# Altium PCB logi-mark1-edu.PcbDoc
Units mil, origin at the board's own origin, x right, y up, seen from the top; angles counter-clockwise.
Board outline 3593 x 2000 mil, 2 copper layers (Top Layer, Bottom Layer); 64 components, 58 nets, 327 pads, 71 vias.
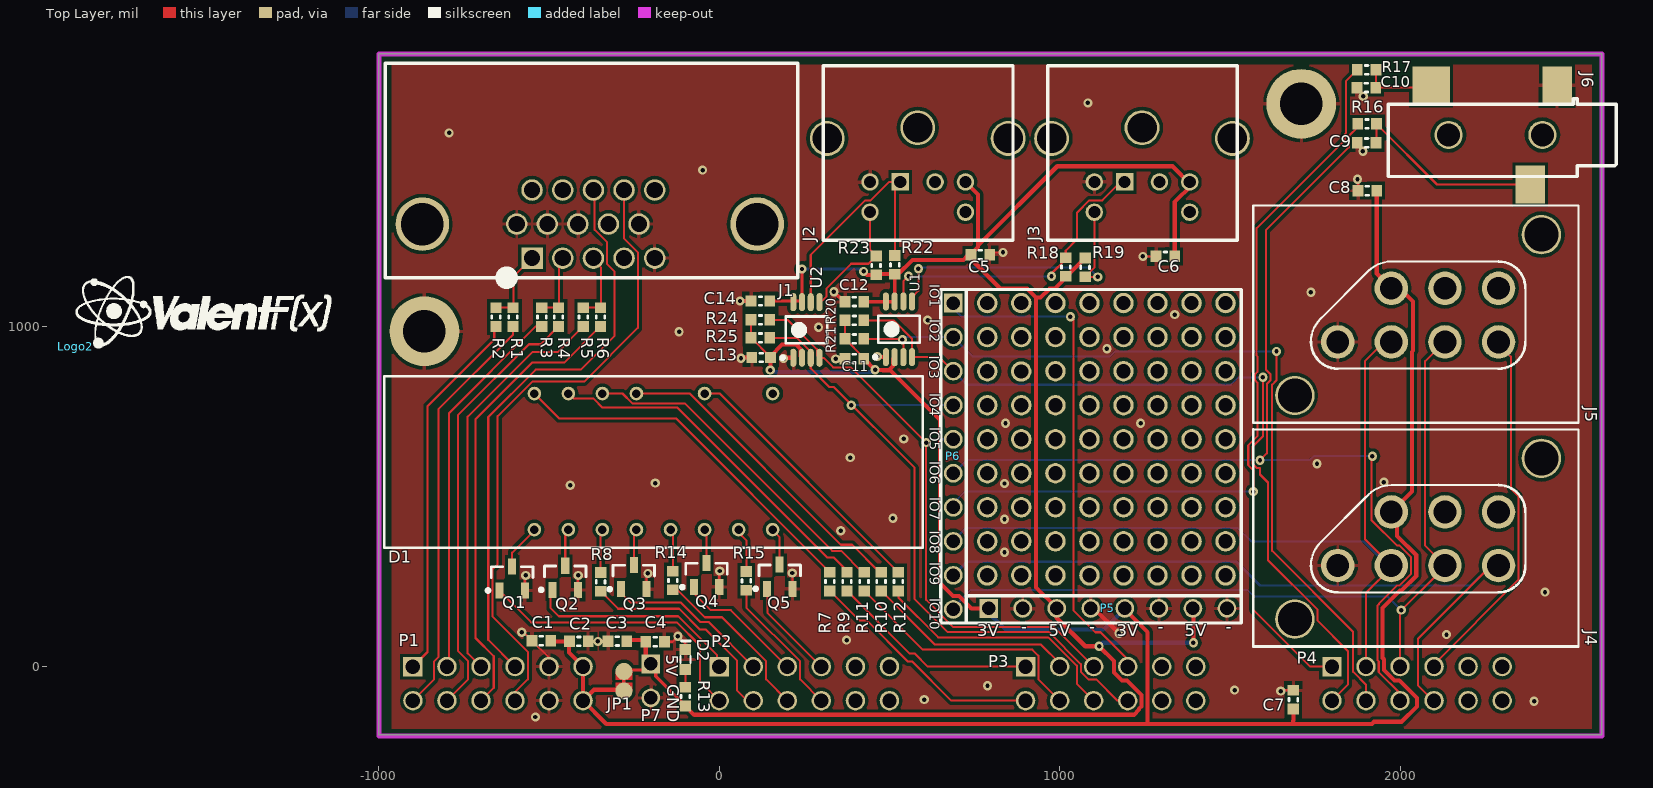
[diagram p0: Top Layer view]
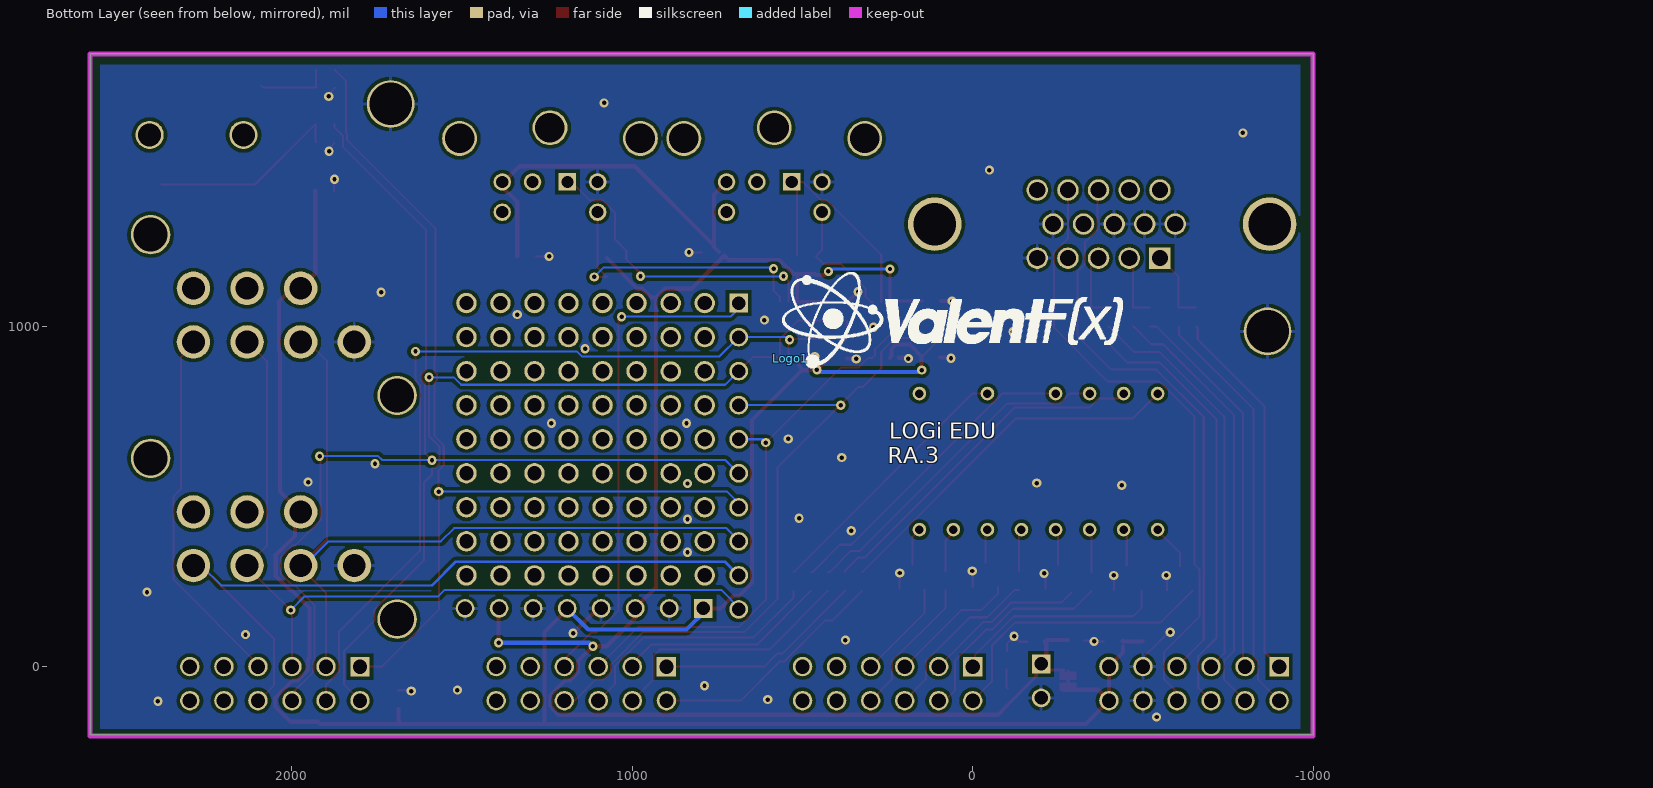
[diagram p1: Bottom Layer view, seen from below]
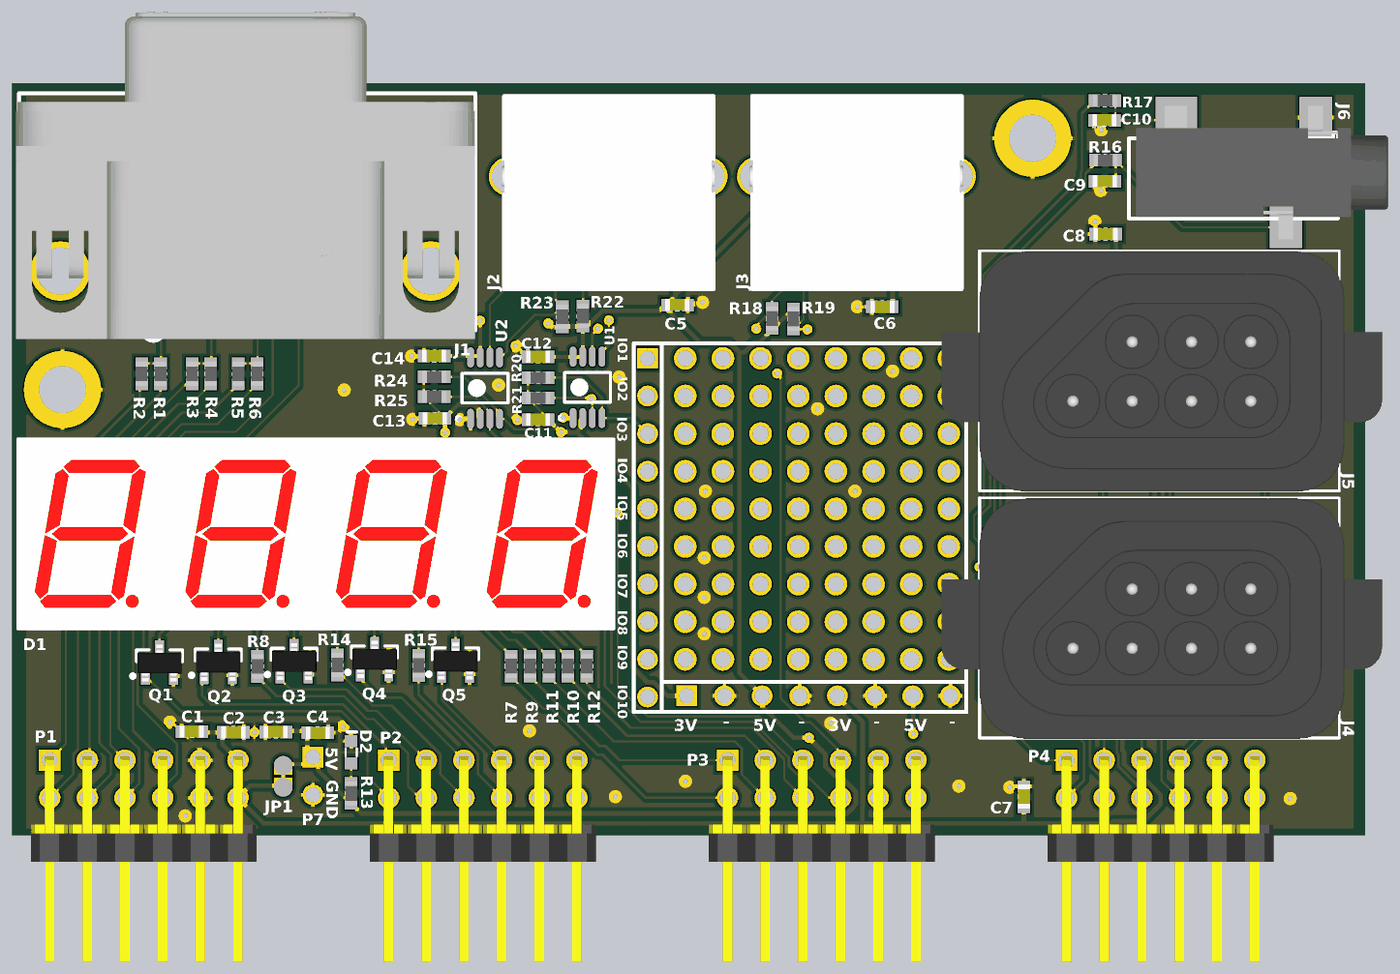
[diagram p2: 3D render of the assembled board from above, using the file's embedded part models]

## Layer stack, top to bottom
Top Solder: solder mask 0.4, Solder Resist, Dk 3.5
Top Layer: signal copper 1.4
Dielectric1: dielectric 12.6, FR-4, Dk 4.8
Bottom Layer: signal copper 1.4
Bottom Solder: solder mask 0.4, Solder Resist, Dk 3.5

## Board outline
-1000,-200 -1000,1800 2593,1800 2593,-200

## Design rules (kind name [scope] priority, off if disabled: settings)
Clearance Poly [InPoly] p1: gap=10
Clearance [All] p2: gap=6
ComponentClearance LEDS+Mounts [(HasFootprint('LTM-450')) vs (HasFootprint('LED T1-3/4 GREEN - 0.45" STANDOFF') OR HasFootprint('LED T1-3/4 RED -  0.45" STANDOFF'))] p1: gap=0 collisioncheckmode=3 verticalgap=0 showdistances=FALSE
ComponentClearance ComponentClearance_1 [OnLayer('Mechanical 1')] p2: gap=0 collisioncheckmode=3 verticalgap=0 showdistances=FALSE
ComponentClearance [All] p3: gap=10 collisioncheckmode=3 verticalgap=10 showdistances=FALSE
Height [All] p1: minheight=0 maxheight=1500 prefheight=500
HoleSize [All] p1: absolutevalues=TRUE maxlimit=250 minlimit=1 maxpercent=80.000 minpercent=20.000
HoleToHoleClearance [All] p1: gap=2 allowstackedmicrovias=TRUE
MinimumSolderMaskSliver [All] p1: minsoldermaskwidth=0
PlaneClearance [All] p1: clearance=10
PolygonConnect via [isvia] p1: connectstyle=Direct reliefconductorwidth=10 reliefentries=4 polygonreliefangle="90 Angle" airgapwidth=10
PolygonConnect PolygonConnect_1 [All] p2: connectstyle=Relief reliefconductorwidth=10 reliefentries=4 polygonreliefangle="90 Angle" airgapwidth=10
RoutingVias [All] p1: holewidth=13 width=27 viastyle="Through Hole" minholewidth=13 minwidth=27 maxholewidth=13 maxwidth=27
SilkToSilkClearance [All] p1: silktosilkclearance=0
SilkToSolderMaskClearance SilkscreenOverComponentPads [IsPad] p1: minsilkscreentomaskgap=0 clearancetoexposedcopper=TRUE
SolderMaskExpansion SolderMaskExpansion_1 [ISVIA] p1: expansion=-100
SolderMaskExpansion [All] p2: expansion=4
Width [All] p1: maxlimit=100 minlimit=6 preferedwidth=6
21 further rules are at their usual default settings.

## Classes and differential pairs
component class ANALOG_IO: C53

## Components (designator, comment, footprint, x,y, rotation, side; value= is the part's Value field where it differs from the comment)
C1 "4.7uF" C0603 -522.44,76 r180 top
C2 ".1uF" C0603 -412.44,74 r0 top
C3 ".1uF" C0603 -299.44,75 r180 top
C4 "4.7uF" C0603 -188.44,73 r0 top
C5 ".1uF" C0603 767,1210 r180 top
C6 ".1uF" C0603 1310.56,1205 r0 top
C7 ".1uF" C0603 1686.56,-97 r90 top
C8 ".1uF" C0603 1904,1398 r180 top
C9 ".1uF" C0603 1902,1538.44 r180 top
C10 ".1uF" C0603 1901,1701 r180 top
C11 ".1uF" C0603 397,905 r180 top
C12 ".1uF" C0603 397,1072 r180 top
C13 ".1uF" C0603 123,908 r180 top
C14 ".1uF" C0603 121,1074 r180 top
D1 "7SEG" "LED - SSEG - LTC-4727JR" -543.2,402.33 r0 top locked
D2 "LED 1.6X0.8MM 570NM GRN CLR SMD" "LED_0603 - GREEN" -99.44,21 r90 top
J1 "VGA" 1-1734530-1 -550,1200 r180 top locked
J2 "PS/2" "MD-60S - PS/2" 583,1335 r180 top
J3 "PS/2" "MD-60S - PS/2" 1242,1335 r180 top
J4 "450-32360" "NES - 450-32360" 1817,297 r90 top locked
J5 "450-32360" "NES - 450-32360" 1817,954 r90 top locked
J6 "SJ-3523-SMT" SJ-3523-SMT 2556,1562 r0 top locked
JP1 "Solder Jumper-NC" SOLDER_JUMPER-NC -280,-14 r90 top net-tie
Logo1 "Valent Logo 1000" ValentFX_1000 534,905 r180 bottom
Logo2 "Valent Logo 750" ValentFX_750 -1890,940 r0 top
P1 "MTSW-106-07-G-D-130-RA" "PMOD HEADER - Male"#1 -900,0 r180 top
P2 "MTSW-106-07-G-D-130-RA" "PMOD HEADER - Male"#2 250,-50 r180 top
P3 "MTSW-106-07-G-D-130-RA" "PMOD HEADER - Male"#2 1150,-50 r180 top
P4 "MTSW-106-07-G-D-130-RA" "PMOD HEADER - Male"#2 2050,-50 r180 top
P5 "Header8" "HEADER_8_40_100THRU SIP" 791.56,171 r0 top
P6 "Header10" "HEADER_10_40_100THRU SIP" 687.56,1068 r270 top
P7 "Header2" "HEADER_2_40_100 THRU SIP" -201,8 r270 top
Q1 "ZXMN2F34FHTA" SOT-23 -608.44,259 r90 top
Q2 "ZXMN2F34FHTA" SOT-23 -452.44,261 r90 top
Q3 "ZXMN2F34FHTA" SOT-23 -251,263 r90 top
Q4 "ZXMN2F34FHTA" SOT-23 -37.44,269 r90 top
Q5 "ZXMN2F34FHTA" SOT-23 177.56,264 r90 top
R1 "220" R0603 -605.86,1027 r90 top
R2 "100" R0603 -655.86,1027 r90 top
R3 "100" R0603 -521.29,1027 r90 top
R4 "220" R0603 -472.25,1027 r90 top
R5 "100" R0603 -399,1027 r90 top
R6 "220" R0603 -349,1027 r90 top
R7 "100" R0603 325,250 r270 top
R8 "100" R0603 -348.44,249 r270 top
R9 "100" R0603 375.25,250 r270 top
R10 "100" R0603 475.75,250 r270 top
R11 "100" R0603 425.5,250 r270 top
R12 "100" R0603 526,250 r270 top
R13 "330" R0603 -99.44,-88 r90 top
R14 "100" R0603 -136.44,253 r270 top
R15 "100" R0603 79.56,252 r270 top
R16 "1k" R0603 1903,1594.44 r0 top
R17 "1k" R0603 1902,1753 r0 top
R18 "10k" R0603 1018,1174 r270 top
R19 "10k" R0603 1075,1173 r90 top
R20 "10k" R0603 397,1017 r180 top
R21 "10k" R0603 397,963 r180 top
R22 "10k" R0603 516,1180.44 r270 top
R23 "10k" R0603 461,1178.44 r270 top
R24 "10k" R0603 121,1018.67 r180 top
R25 "10k" R0603 121,966 r180 top
U1 "NVT2002DP,118" "NVT2002DP,118 - TSOP65P490X110-8L" 528,991 r90 top
U2 "NVT2002DP,118" "NVT2002DP,118 - TSOP65P490X110-8L" 256,989 r90 top

## Footprints (in the part's own frame and the unit in brackets; to place one, negate y for a bottom-side part, rotate by r counter-clockwise, add the part's x,y. Pads: shape width x height; smd on the part's side, far side on the other; paste and mask are expansions set on the pad)
1-1734530-1 [mm] "VGA DB15 HD connector female"
  rect 1.6x1.6 hole 1.2: 1(0,0)
  round 1.6 hole 1.2: 2(-2.29,0) 3(-4.58,0) 4(-6.87,0) 5(-9.16,0) 6(1.14,-2.54) 7(-1.14,-2.54) 8(-3.42,-2.54) 9(-5.7,-2.54) 10(-7.98,-2.54) 11(0,-5.08) 12(-2.29,-5.08) 13(-4.58,-5.08) 14(-6.87,-5.08) 15(-9.16,-5.08)
  round 4 hole 3.18: X(-16.81,-2.54) X(8.18,-2.54)
  silkscreen extent -19.82,-14.54 10.96,1.54, body extent -19.79,-20.01 11.16,2.04, height 12.25
C0603 [mm] "0603 Generic"
  rect 0.8x0.85 smd: 1(-0.7,0) 2(0.7,0)
  silkscreen extent -0.1,-0.33 0.1,0.33, body extent -0.8,-0.42 0.82,0.4, height 0.46
"HEADER_2_40_100 THRU SIP" [mil]
  rect 55x55 hole 40: 1(0,0)
  round 55 hole 40: 2(100,0)
"HEADER_8_40_100THRU SIP" [mil]
  rect 55x55 hole 40: 1(0,0)
  round 55 hole 40: 2(100,0) 3(200,0) 4(300,0) 5(400,0) 6(500,0) 7(600,0) 8(700,0)
"HEADER_10_40_100THRU SIP" [mil] "HEADER 100 MIL PITCH"
  rect 55x55 hole 40: 1(0,0)
  round 55 hole 40: 2(100,0) 3(200,0) 4(300,0) 5(400,0) 6(500,0) 7(600,0) 8(700,0) 9(800,0) 10(900,0)
"LED - SSEG - LTC-4727JR" [mil] "LED - SSEG - LTC-4727JR"
  round 40 hole 25: 1(0,0) 2(100,0) 3(200,0) 4(300,0) 5(400,0) 6(500,0) 7(600,0) 8(700,0) 9(700,400) 11(500,400) 13(300,400) 14(200,400) 15(100,400) 16(0,400)
  silkscreen extent -441,-53 1141,451, body extent -441,-53 1141,451, height 276
"LED_0603 - GREEN" [mm] "LED_0603 - GREEN"
  rect 0.8x0.85 smd: A(-0.75,0) C(0.75,0)
  silkscreen extent -0.25,-0.38 1.37,0.38, body extent -0.8,-0.4 0.8,0.4, height 0.75
"MD-60S - PS/2" [mm]
  rect 1.3x1.3 hole 0.9: 1(1.3,-2.26)
  round 1.3 hole 0.9: 2(-1.3,-2.26) 3(3.56,-2.26) 4(-3.56,-2.26) 5(3.56,0) 6(-3.56,0)
  round 2.6 hole 2.2: x(-6.75,-5.5) x(0,-6.3) x(6.75,-5.5)
  silkscreen extent -7.11,-10.92 7.04,2.1, body extent -7.17,-11 7.17,2.1, height 13.3
"NES - 450-32360" [mm] "NES Controller Socket"
  round 2.5 hole 1.7: 1(0,0) 2(0,-4) 3(0,-8) 4(0,-12) 5(4,-12) 6(4,-8) 7(4,-4)
  round 2.94 hole 2.54 paste+0: 8(-4,3.2) 9(8,-15.2)
  silkscreen extent -6.04,-17.96 10.16,6.3, body extent -6.12,-20.85 10.13,8.86, height 17.61
"NVT2002DP,118 - TSOP65P490X110-8L" [mm] "TSOP, 8-Leads, Body 3.1x3.1mm (max), Pitch 0.65mm, IPC High Density"
  oval 1.35x0.45 smd: 1(-2.075,0.975) 2(-2.075,0.325) 3(-2.075,-0.325) 4(-2.075,-0.975) 5(2.075,-0.975) 6(2.075,-0.325) 7(2.075,0.325) 8(2.075,0.975)
  silkscreen extent -2.2,-1.55 1,1.9, body extent -1.55,-1.55 1.55,1.55, height 1.1
"PMOD HEADER - Male"#1 [mil] "68021-212HLF"
  rect 57x57 hole 42: 1(0,0)
  round 57 hole 42: 2(-100,0) 3(-200,0) 4(-300,0) 5(-400,0) 6(-500,0) 7(0,100) 8(-100,100) 9(-200,100) 10(-300,100) 11(-400,100) 12(-500,100)
  body extent -550,-10 50,536, height 225
"PMOD HEADER - Male"#2 [mil] "68021-212HLF"
  rect 57x57 hole 42: 1(250,-50)
  round 57 hole 42: 2(150,-50) 3(50,-50) 4(-50,-50) 5(-150,-50) 6(-250,-50) 7(250,50) 8(150,50) 9(50,50) 10(-50,50) 11(-150,50) 12(-250,50)
  body extent -300,-60 300,486, height 225
R0603 [mm] "0603 Generic"
  rect 0.8x0.85 smd: 1(-0.7,0) 2(0.7,0)
  silkscreen extent -0.1,-0.33 0.1,0.33, body extent -0.81,-0.41 0.81,0.41, height 0.46
SJ-3523-SMT [mm] "3.5MM Stereo Audio Jack"
  rect 2.2x2.8 smd: 1(-2.4,3.7) 3(-4.4,-3.7)
  rect 2.8x2.8 smd: 2(-11.8,3.7)
  round 2.108 hole 1.727 unplated: H1(-3.5,0) H2(-10.5,0)
  silkscreen extent -15,-3.1 2,2.7, body extent -14.52,-4.5 2.48,4.5, height 5.04
SOLDER_JUMPER-NC [mil]
  round 50 smd: 1(0,0) 2(-58,0)
  Top Layer region: 0.09,25.01 -24.91,25.01 -24.91,-24.99 0.09,-24.99
  Top Layer region: -32.91,25.01 -57.91,25.01 -57.91,-24.99 -32.91,-24.99
  Top Layer lines w10: -50,0 0,0
SOT-23 [mm] "SOT-23"
  rect 1.2x0.6 smd: 1(-0.9,0.95) 2(-0.9,-0.95) 3(0.9,0)
  silkscreen extent -1.02,-1.55 0.87,1.92, body extent -1.27,-1.5 1.23,1.5, height 1.07
ValentFX_750 [mil]
  silkscreen extent 0,-3 750,207
ValentFX_1000 [mil]
  silkscreen extent -25,-28 975,252

## Part data
C1 C4: library part "C0603 - GRM188F51A475ZE20D", "4.7uF 10volts Y5V +80-20% (MLCC) - SMD/SMT 0603"
C2 C3 C5 C6 C7 C8 C9 C10 C11 C12 C13 C14: library part "C0603 - GRM188R71H104KA93D", "0.1uF 50volts X7R 10% MLCC SMD/SMT 0603"
D1: library part "LED - SSEG - LTC-4727JR", "LED Displays & Accessories 4 Digit, Red Low Current"
D2: library part APT1608CGCK
J1: library part "VGA - 1-1734530-1", "CONN HD D-SUB RCPT R/A 15POS"
J2 J3: library part "Con - D-60S", "CONN MINIDIN RECPT UNSHIELD 6POS - PS/2 mouse - keybaord"
J4 J5: "NES CONTROLLER SOCKET"
J6: "CONN AUDIO JACK 3.5MM STEREO SMD"
JP1: "Solder/Configuration Jumper"
P1 P2 P3 P4: library part "P-MOD - MTSW-106-07-G-D-130-RA", "Samtec Male Conn Unshrouded Header HDR 12 POS 2.54mm Solder RA Thru-Hole"
P5: "Header 8 pin"
P6: "Header 10 pin"
P7: "Header 2 pin"
Q1 Q2 Q3 Q4 Q5: "MOSFET N-CHAN 20V SOT23-3"
R1 R4 R6: library part "R0603 - ERJ-3EKF2200V", "220 - thick Film Resistors - SMD 0603 220ohms 1% Tol"
R2 R3 R5: library part "R0603 - CRCW0603100RFKEA", "100 ohms 1% Thick Film Resistors - SMD 1/10watt"
R7 R8 R9 R10 R11 R12 R14 R15: library part Res-Eli, "RES 10.0K OHM 1/10W 1% 0603 SMD"
R13: library part ERJ-3EKF3300V, "RES 330 OHM 1/10W 1% 0603 SMD"
R16 R17: library part ERJ-3EKF1001V, "RES 1.00K OHM 1/10W 1% 0603 SMD"
R18 R19 R20 R21 R22 R23 R24 R25: library part "R0603 - CRCW060310K0FKEA", "10k Thick Film Resistors - SMD 1/10watt 10Kohms 1%"
U1 U2: "Translation - Open Drain - 2 Lines - Voltage Levels Interface IC"

## Free pads (board coordinates)
  round 205 / inner round 140 / far side round 140 hole 125: MT1(1710,1653) MT2(-866,985)
  round 60 hole 42: X(787.56,268) X(787.56,368) X(787.56,468) X(787.56,568) X(787.56,668) X(787.56,768) X(787.56,868) X(787.56,968) X(787.56,1068) X(887,867) X(887.56,268) X(887.56,368) X(887.56,468) X(887.56,568) X(887.56,668) X(887.56,768) X(887.56,968) X(887.56,1068) X(987.56,268) X(987.56,368) X(987.56,468) X(987.56,568) X(987.56,668) X(987.56,768) X(987.56,868) X(987.56,968) X(987.56,1068) X(1087.56,268) X(1087.56,368) X(1087.56,468) X(1087.56,568) X(1087.56,668) X(1087.56,768) X(1087.56,868) X(1087.56,968) X(1087.56,1068) X(1187.56,268) X(1187.56,368) X(1187.56,468) X(1187.56,568) X(1187.56,668) X(1187.56,768) X(1187.56,868) X(1187.56,968) X(1187.56,1068) X(1287.56,268) X(1287.56,368) X(1287.56,468) X(1287.56,568) X(1287.56,668) X(1287.56,768) X(1287.56,868) X(1287.56,968) X(1287.56,1068) X(1387.56,268) X(1387.56,368) X(1387.56,468) X(1387.56,568) X(1387.56,668) X(1387.56,768) X(1387.56,868) X(1387.56,968) X(1387.56,1068) X(1487.56,268) X(1487.56,368) X(1487.56,468) X(1487.56,568) X(1487.56,668) X(1487.56,768) X(1487.56,868) X(1487.56,968) X(1487.56,1068)

## Via types
v1: diameter 27, hole 13, Top Layer to Bottom Layer, 71 vias

## Nets (pads, with @x,y where several pads share a name; then routed paths per layer and width w, separated by ;. In a path a pad name is that pad's centre, name@x,y a point inside that pad or via, vN(x,y) a via of type N, cw(c..) or ccw(c..) an arc to the next point about the centre after c; other vN are vias at no path point)
3V3: C1.1 C2.1 C7.1 C8.1 C11.1 C13.1 J4.7 J5.7 JP1.2 P1.6 P1.12 P5.1 P5.5 R20.2 R21.2 R24.2 R25.2 U1.2 U2.2 | length 7198.5
  Top Layer w6: R24.2 R25.2 150.56,908.88 C13.1 ; R20.2 R21.2 424.56,907.88 C11.1
  Top Layer w12: C1.1@-498.44,75 -497.44,74 C2.1@-440.44,74 ; C2.1@-441,58.44 -441,41 P1.6 ; C2.1@-440.44,76 C2.1@-440.44,74 ; C2.1 C2.1@-440.44,74 ; P1.6@-403.44,-5 -400,-8.44 P1.12 ; JP1.2@-267,-68 -368,-68 P1.12 ; v1(150,871) 150,907.44 C13.1 ; C13.1@150.56,908.88 150.56,911.56 184.88,945.88 226.25,945.88 238.47,933.66 238.47,912.04 U2.2 ; C11.1 v1(457.71,871.85) 479.85,871.85 480.97,870.73 498.25,870.73 ; U1.2 510.47,904.57 510.47,882.95 498.25,870.73 ; P5.1 740.42,171 703.92,207.5 686.5,207.5 648.06,245.94 648.06,723.94 501.27,870.73 498.25,870.73 ; P5.5@1181.56,178 1258.5,101.06 1258.5,-124.23 1257.56,-125.17 1257.56,-166 ; 1685.56,-160 1686.56,-159 C7.1 ; C8.1 1931.56,1154.4 J5.7 ; J4.7 2034.56,514.56 2034.56,924.51 2038.69,928.65 2038.69,1072.87 J5.7@1991.56,1120 ; J4.7@1991.56,442 1991.56,383.46 2047.69,327.33 2047.69,266.67 2004.81,223.79 2000.35,223.79 1948.56,172 1948.56,25.69 1952.5,21.75 1952.5,-9.78 1983.22,-40.5 1997.78,-40.5 2049.56,-92.28 2049.56,-117 2004.56,-162 1923.56,-162 1917.56,-168 -332,-168 P1.12
  Bottom Layer w12: v1(150,871) 155,866 451.85,866 v1(457.71,871.85) ; P5.1@779.56,170 840.56,109 1129.56,109 P5.5
GND: C1.2 C2.2 C3.2 C4.2 C5.1 C6.1 C7.2 C8.2 C9.2 C10.2 C11.2 C12.2 C13.2 C14.2 D2.C J1.5 J1.6 J1.7 J1.8 J1.10 J2.3 J3.3 J4.1 J5.1 J6.1 P1.5 P1.11 P5.2 P5.4 P5.6 P5.8 P7.2 pad.MT1 pad.MT2 Q1.2 Q2.2 Q3.2 Q4.2 Q5.2 U1.1 U2.1 | length 1050.5
  Top Layer w6: v1(-580.44,101) -575,101 C1.2 ; Q1.2 -571.04,265.4 v1(-568.44,268) ; C1.2@-552.44,78 -500,25.56 P1.5 ; Q2.2 -415.04,267.4 v1(-414.44,268) ; C2.2 v1(-356.44,74) -353.44,77 C3.2@-327.44,77 ; Q3.2 -213.6,269.84 v1(-209.44,274) ; C4.2 -137.44,73 v1@-121.94,88.5 ; D2.C@-100.44,45 -100.44,67 v1@-121.94,88.5 ; Q4.2 -0.04,279.4 v1(1.56,281) ; v1(214.56,275) 214.96,274.6 Q5.2 ; C5.1@795.12,1217 v1(833.56,1217) ; v1(1244.56,1205) C6.1 ; v1(1649.56,-72) 1652.12,-69.44 C7.2 ; C10.2 1892,1682.44 v1(1892,1675) ; C9.2 1891,1521.88 v1(1891,1514) ; v1(1875,1432) 1876.44,1430.56 C8.2 ; v1@-121.94,88.5 -122.44,89 v1(-121.44,89) v1@-121.94,88.5
  Top Layer w12: v1(61,1074) C14.2 ; v1(64,906) 66,908 C13.2 ; v1(189,905) 191.31,907.31 U2.1 ; v1(337,1101) 366,1072 C12.2 ; v1(342,904) 343,905 C11.2 ; v1(464,911) 465.69,909.31 U1.1 ; P5.4 1101,171 v1(1174,98)
  other v1: -540,-148 2394,-102 602,-97 1514,-69 788,-56 374,78 2136.56,94 2426,219 838,336 357,399 838,433 510,436 -438,533 838,538 -188,539 1952.56,542 1756,595.9 385,614 542,669 841,715 1238,715 1139,934 -118,984 292,997 612,1018 1338,1034 1738.26,1099.87 -49,1458.65 -793.8,1568 1083,1656
IO1: P3.4 P6.1 | length 1484.5
  Top Layer w6: v1(1031.56,1028) 1040.56,1019 1040.56,165.44 1105,101 1120,101 1200,21 P3.4
  Bottom Layer w6: P6.1@670.56,1069 711.56,1028 v1(1031.56,1028)
NES1_DAT: J5.4 P4.4 | length 1062.9
  Top Layer w6: P4.4 2100,7.44 2347.65,255.09 2347.65,500.69 2326.66,521.68 2326.66,905.9 2325.66,904.9 2325.66,910.9 J5.4@2298.56,938
NES2_DAT/IO9: J4.4 P4.10 P6.9 | length 2147.8
  Top Layer w6: P4.10@2093.56,-96 2052.56,-55 2052.56,81 2258.56,287 J4.4@2275.56,287
  Bottom Layer w6: 1588.56,238.79 2208.35,238.79 J4.4@2264.56,295
  Bottom Layer w8: P6.9 727.56,308 1519.35,308 1588.56,238.79
NES_CLK/IO8: J4.2 J5.2 P4.2 P6.8 | length 2377.1
  Top Layer w6: P4.2 1900,216.44 J4.2@1975.56,292 ; J5.2@1950.56,948 1947.56,948 1896.5,896.94 1896.5,374.98 J4.2
  Bottom Layer w6: P6.8@681.56,365 723.56,407 1523.56,407 1562.56,368 1892.56,368 J4.2@1964.56,296
NES_LAT/IO10: J4.3 J5.3 P4.3 P6.10 | length 2390.3
  Top Layer w6: P4.3 v1@2000,161.44 ; v1@2004.06,165.5 J4.3@2114.56,276 ; J5.3@2110.56,934 2073.75,897.19 2073.75,355.21 J4.3 ; J4.3@2115.56,275 J4.3@2134.76,294.2
  Bottom Layer w6: P6.10@682.56,169 739.06,225.5 1551.45,225.5 1570.56,206.39 1963.17,206.39 v1(2003.56,166)
NetC9_1: C9.1 J6.3 R16.2 | length 580.2
  Top Layer w6: C9.1@1930,1540.44 1930.56,1541 R16.2 2108.67,1416.33 J6.3
NetC10_1: C10.1 J6.2 R17.2 | length 218.1
  Top Layer w6: R17.2 1929.56,1702 C10.1 2084.76,1701 J6.2
NetD1_1: D1.1 Q1.3 | length 133.9
  Top Layer w6: Q1.3 -608.44,335 D1.1@-542.44,401
NetD1_2: D1.2 Q2.3 | length 107.5
  Top Layer w6: Q2.3 -452.44,393 -445.44,400 D1.2@-445.44,401
NetD1_3: D1.3 R8.1 | length 130.3
  Top Layer w6: R8.1 -348.44,404 D1.3@-346.44,406
NetD1_4: D1.4 Q3.3 | length 104.7
  Top Layer w6: Q3.3 -251,392.44 D1.4@-243.44,400
NetD1_5: D1.5 R14.1 | length 127.8
  Top Layer w6: D1.5@-144.44,405 -136.44,397 R14.1
NetD1_6: D1.6 Q4.3 | length 92.1
  Top Layer w6: D1.6@-43.44,394 -37.44,388 Q4.3
NetD1_7: D1.7 R15.1 | length 124
  Top Layer w6: D1.7@56.56,394 79.56,371 R15.1
NetD1_8: D1.8 Q5.3 | length 106
  Top Layer w6: D1.8@159.56,398 177.56,380 Q5.3
NetD1_11: D1.11 R12.1 | length 786.6
  Top Layer w6: D1.11 1.23,802.33 R12.1
NetD1_13: D1.13 R10.1 | length 936.3
  Top Layer w6: D1.13 -87.04,802.33 357.29,358 390.27,358 470.71,277.56 R10.1
NetD1_14: D1.14 R11.1 | length 986.1
  Top Layer w6: D1.14 -284.21,802.33 -255.21,773.33 -101.33,773.33 332,340 358.02,340 420.46,277.56 R11.1
NetD1_15: D1.15 R9.1 | length 1038.3
  Top Layer w6: D1.15 -427.87,787 -368.88,787 -343.21,761.33 -123.33,761.33 318,320 337,320 375.25,281.75 R9.1
NetD1_16: D1.16 R7.1 | length 1085.6
  Top Layer w6: D1.16 -469.87,729 -126.44,729 R7.1
NetD2_A: D2.A R13.2 | length 56.7
  Top Layer w6: R13.2@-102.44,-64 -99.44,-61 R13.2 D2.A
NetJ1_1: J1.1 R1.2 R2.2 | length 218.6
  Top Layer w6: R2.2 R1.2 -604.86,1055.56 -604.86,1145.14 J1.1
NetJ1_2: J1.2 R3.2 R4.2 | length 199.6
  Top Layer w6: R3.2 R4.2 -471.25,1055.56 -471.25,1188.59 J1.2
NetJ1_3: J1.3 R5.2 R6.2 | length 211.3
  Top Layer w6: R5.2 R6.2 -348,1055.56 -348,1173 J1.3@-378,1203
PS2_1_CLK/IO3: P4.7 P6.3 R20.1 U1.4 | length 2395.7
  Top Layer w6: R20.1 512.82,1017 566.39,963.43 U1.4 646.25,909.31 P6.3 ; v1(1597,850) 1597,676 1566.06,645.06 1566.06,596.68 1579.24,583.5 1588.56,583.5 1588.56,564.44 1612.14,540.86 1612.14,312.97 1757.89,167.22 1757.89,135.11 1847,46 1847,-53 P4.7
  Bottom Layer w6: P6.3 727.56,828 1502.71,828 1524.71,850 v1(1597,850)
PS2_1_CLK/IO3_HV: J3.5 R19.1 U1.5 | length 881.3
  Top Layer w6: U1.5 566.39,1085 585,1103.61 v1(585,1169) ; J3.5 1101.84,1172.28 R19.1 1075.44,1145 v1(1112,1145)
  Bottom Layer w6: v1(585,1169) 588,1172 1085,1172 v1(1112,1145)
PS2_1_DAT/IO2: P4.8 P6.2 R21.1 U1.3 | length 2443.8
  Top Layer w6: R21.1 535,963 v1(538,960) 540.8,957.2 U1.3 ; v1(1637,926) 1637,841.21 1624.14,828.35 1624.14,340.14 1862.5,101.78 1862.5,-15.53 1900,-53.03 P4.8
  Bottom Layer w6: v1(538,960) 546,968 P6.2 744.06,911.5 1148.32,911.5 1162.82,926 v1(1637,926)
PS2_1_DAT/IO2_HV: J3.1 R18.1 U1.6 | length 895.6
  Top Layer w6: U1.6 540.8,1131.8 v1(556,1147) ; v1(976,1147) 976,1154.92 1018,1196.92 R18.1 1018,1222 1051,1255 1051,1333.08 1087.51,1369.59 1125.59,1369.59 1179.98,1423.98 J3.1
  Bottom Layer w6: v1(556,1147) 556.5,1146.5 975.5,1146.5 v1(976,1147)
PS2_2_CLK/IO5: P3.3 P6.5 R24.1 U2.4 | length 1753.2
  Top Layer w6: R24.1 200.41,1018.67 286.65,932.42 286.65,915.04 U2.4 306.87,907.31 334.91,879.27 386.73,879.27 v1(608,658) 608,195.94 687.94,116 984,116 P3.3 P3.3@1100,3.56 ; P3.3@1099.28,-0.72 P3.3@1107.56,-9
  Bottom Layer w6: v1(608,658) 618,668 P6.5
PS2_2_CLK/IO5_HV: J2.5 R23.1 U2.5 | length 372.8
  Top Layer w6: U2.5 298.13,1070.69 314.5,1087.06 314.5,1110.32 387.68,1183.5 438.5,1183.5 R23.1 442.84,1224.16 J2.5
PS2_2_DAT/IO4: P3.10 P6.4 R25.1 U2.3 | length 2060.6
  Top Layer w6: R25.1 227.48,966 268.8,924.69 U2.3 268.8,876.2 324,821 337,821 574,584 574,198 670,102 968,102 1062.5,7.5 1062.5,-15.53 1084.47,-37.5 1107.5,-37.5 1170,-100 P3.10
  Bottom Layer w6: v1(388,768) P6.4
PS2_2_DAT/IO4_HV: J2.1 R22.1 U2.6 | length 713.4
  Top Layer w6: U2.6 268.8,1209.87 428.51,1369.59 444.59,1369.59 498.98,1423.98 J2.1 516,1408.16 R22.1
PWM1/IO6: P4.9 P6.6 R16.1 | length 3215.1
  Top Layer w6: v1(1588.56,606) 1609,626.44 1609,830.18 1619.5,840.68 1619.5,859.32 1606,872.82 1606,1282 1849.69,1525.69 1849.69,1558.9 1875.44,1584.65 R16.1 ; v1(1919,618) 1916.27,615.27 1916.27,430.37 1991.42,355.21 1998.59,355.21 2032.69,321.11 2032.69,272.89 1998.59,238.79 1991.79,238.79 1938,185 1938,182.65 1933.56,178.21 1933.56,19.47 1937.5,15.53 1937.5,-15.99 2000,-78.49 P4.9
  Bottom Layer w6: P6.6 726.56,607 1735.28,607 1746.68,618.4 1918.6,618.4 v1(1919,618)
PWM2/IO7: P4.1 P6.7 R17.1 | length 2938.4
  Top Layer w6: P4.1 1735.96,0 1568.56,167.4 v1(1568.56,514) 1570.06,515.5 1570.06,575.71 1554.06,591.71 1554.06,650.03 1581,676.97 1581,834.18 1574.5,840.68 1574.5,859.32 1581,865.82 1581,911.35 1579,913.35 1579,1288 1837.69,1546.69 1837.69,1563.87 1841,1567.18 1841,1719.56 R17.1
  Bottom Layer w6: P6.7@680.56,473 721.56,514 v1(1568.56,514)
SEG_CTRL_A1: P2.7 Q1.1 | length 841.7
  Top Layer w6: Q1.1 -552.28,130 -124.44,130 -56.44,62 -56.44,-43.56 P2.7
SEG_CTRL_A2: P2.1 Q2.1 | length 668.4
  Top Layer w6: Q2.1@-495.44,224 -495.44,172 -471.44,148 -121,148 -6.44,33.44 -6.44,6.44 P2.1 ; P2.1@-26.44,20 P2.1@-2.44,-4
SEG_CTRL_A3: P2.3 Q4.1 | length 385.1
  Top Layer w6: Q4.1 -74.84,215.4 -25.44,166 34,166 P2.3 ; P2.3@200.56,7 P2.3@202.56,5
SEG_CTRL_A4: P2.4 Q5.1 | length 292.5
  Top Layer w6: Q5.1@143.56,226 141.56,224 141.56,158.44 P2.4
SEG_CTRL_L: P2.2 Q3.1 | length 479.3
  Top Layer w6: Q3.1@-289.44,217 -260.44,188 -112.44,188 -55.44,131 -31,131 P2.2
SSEG0_A: P3.8 R11.2 | length 748.9
  Top Layer w6: R11.2 597.94,50 919.73,50 937.5,32.23 937.5,-37.5 P3.8
SSEG1_B: P3.7 R7.2 | length 708.6
  Top Layer w6: R7.2 411.44,136 433,136 554,15 567,15 682,-100 P3.7
SSEG2_C: P3.2 R10.2 | length 622.2
  Top Layer w6: R10.2 633.19,65 945,65 1000,10 P3.2
SSEG3_D: P2.8 R8.2 | length 644.6
  Top Layer w6: R8.2 -297,170 -117.69,170 -56.69,109 -39.27,109 51.56,18.17 51.56,-70 95.56,-114 P2.8@95.56,-107 ; P2.8@97.56,-107 P2.8@97.56,-104
SSEG4_E: P2.9 R14.2 | length 505.9
  Top Layer w6: R14.2 -122.88,225.44 -42.44,145 8.03,145 137.5,15.53 137.5,-37.5 P2.9@199,-99 ; P2.9 P2.9@199,-99 ; P2.9@202.56,-99 P2.9@199,-99
SSEG5_F: P3.9 R12.2 | length 750
  Top Layer w6: R12.2 526,203 643,86 967.03,86 1050.5,2.53 1050.5,-50.5 P3.9
SSEG6_G: P3.1 R9.2 | length 616.9
  Top Layer w6: R9.2 559.69,38 575,38 613,0 P3.1
SSEG7_DP: P2.10 R15.2 | length 415.8
  Top Layer w6: R15.2 79.56,173.47 237.5,15.53 237.5,-37.5 P2.10
VDD_PS2: C3.1 C4.1 C5.2 C6.2 C12.1 C14.1 J2.4 J3.4 JP1.1 P5.3 P5.7 P7.1 R13.1 R18.2 R19.2 R22.2 R23.2 U1.7 U1.8 U2.7 U2.8 | length 6026.5
  Top Layer w10: JP1.1@-267,-10 -197,-10 -187,0 -187,-28 R13.1 ; C14.1 239.9,1074 U2.7 243.2,1167.8 v1(243,1168) ; C12.1 514.51,1072 U1.7 516,1073.49 R22.2
  Top Layer w12: C3.1@-278.44,77 -279.44,78 -216.44,78 C4.1@-211.44,73 ; C4.1 -216,29 P7.1@-187,0 ; R13.1 -73.5,-141.5 1218.06,-141.5 1233.56,-126 1233.56,-123.72 1240.5,-116.78 1240.5,-83.22 1197.78,-40.5 1183.22,-40.5 1159.5,-16.78 1159.5,16.06 v1(1115.78,59.78) 1075.22,59.78 991.56,143.44 P5.3 ; v1(424,1161) 434.12,1150.88 R23.2 463,1152.88 R22.2 525.82,1152.88 567.44,1194.5 717.5,1194.5 730,1207 827,1110 904.96,1110 931.06,1083.9 ; J2.4 760.75,1386.39 760.75,1237.75 ; C5.2@745.56,1218 760.75,1233.19 760.75,1237.75 ; P5.3@990.56,173 931.06,232.5 931.06,1083.9 ; R19.2 984.44,1110 970.16,1110 944.06,1083.9 931.06,1083.9 ; C6.2 1338.12,1364.56 J3.4@1388.56,1415 ; J3.4@1386.56,1415 1331.56,1470 993,1470 760.75,1237.75 ; P5.7 1393,169.56 v1(1393,70)
  Bottom Layer w10: v1(243,1168) 417,1168 v1(424,1161)
  Bottom Layer w12: v1(1115.78,59.78) 1126,70 v1(1393,70)
VGA_B0: P1.9 R6.1 | length 1352.1
  Top Layer w6: P1.9 -662.5,-62.5 -662.5,30.5 -716,84 -716,727 -550,893 -455.44,893 R6.1 ; R6.1@-346.88,999.44 R6.1@-346.88,1007
VGA_B1: P1.3 R5.1 | length 1200.1
  Top Layer w6: P1.3 -739,39 -739,734 -549,924 -474.44,924 R5.1
VGA_G0: P1.8 R4.1 | length 1280.6
  Top Layer w6: P1.8 -737.5,-37.5 -737.5,15.53 -768,46.03 -768,738 -559,947 -524.69,947 R4.1
VGA_G1: P1.2 R3.1 | length 1125
  Top Layer w6: P1.2 -794,6 -794,744 -538.56,999.44 R3.1
VGA_HS: J1.13 P1.4 | length 1697
  Top Layer w6: P1.4 -678.65,78.65 -678.65,733.35 -539.45,872.55 -406.45,872.55 -308,971 -308,1161.06 -329.19,1182.25 -329.19,1246.33 -366.09,1283.23 -366.09,1395.65 J1.13@-375.44,1405
VGA_R0: P1.7 R1.1 | length 1234.3
  Top Layer w6: P1.7@-909.44,-109 P1.7@-900.22,-99.78 ; P1.7 -837.5,-37.5 -837.5,15.53 -825,28.03 -825,756 -605.86,975.14 R1.1
VGA_R1: P1.1 R2.1 | length 1100.6
  Top Layer w6: P1.1 -857,43 -857,765 -661,961 -661,994.3 R2.1
VGA_VS: J1.14 P1.10 | length 1850.7
  Top Layer w6: P1.10@-599.44,-109 -599.44,-74.44 -562.5,-37.5 -562.5,43.29 -666.65,147.45 -666.65,285.35 -651,301 -651,735.54 -549.29,837.25 -396.75,837.25 -239.03,994.97 -239.03,1216.77 -279.53,1257.27 J1.14
pads on no net: D1.9 J1.4 J1.9 J1.11 J1.12 J1.15 J1.X J2.2 J2.6 J2.x J3.2 J3.6 J3.x J4.5 J4.6 J4.8 J4.9 J5.5 J5.6 J5.8 J5.9 J6.H1 J6.H2 P2.5 P2.6 P2.11 P2.12 P3.5 P3.6 P3.11 P3.12 P4.5 P4.6 P4.11 P4.12

## Polygon pours and split planes (outlines as drawn)
GND on Top Layer "GND_TOP" (solid, remove dead copper, pour order 3): -962.44,1768 -962.44,-182 2562.56,-182 2562.56,1743 2562.56,1768 -962.44,1768
GND on Bottom Layer "GND_BOT" (solid, remove dead copper, pour order 4): -962.44,1768 -962.44,-182 2562.56,-182 2562.56,1743 2562.56,1768 -962.44,1768

## Keep-outs
Keep-Out Layer:
  lines w15: -1000,-204 2593,-204 2593,1800 -1000,1800 -1000,-204

## Silkscreen, mask and mechanical layers (free items; w line width, h text height)
Top Overlay:
  lines w10: 725.06,208 1534.06,208 1534.06,128 ; 727.37,1108 725.06,1105.69 725.06,128 ; 725.06,128 650.81,128 650.81,1108 1534.06,1108 1534.06,128 ; 725.06,128 1534.06,128
  text "IO1" at 608.39,1123.51 h50 r270
  text "IO2" at 608.39,1020.39 h50 r270
  text "IO3" at 607,913 h50 r270
  text "IO4" at 608.39,803.33 h50 r270
  text "IO5" at 608.39,703.49 h50 r270
  text "IO6" at 608.39,603.19 h50 r270
  text "IO7" at 608.39,496.9 h50 r270
  text "IO8" at 608.49,399.19 h50 r270
  text "IO9" at 608.39,306.82 h50 r270
  text "IO10" at 608.39,201.4 h50 r270
  text "-" at 887.56,88 h60
  text "-" at 1087.56,88 h60
  text "-" at 1287.56,88 h60
  text "-" at 1487.56,88 h60
  text "3V" at 757.56,78 h60
  text "5V" at 967.56,78 h60
  text "3V" at 1167.56,78 h60
  text "5V" at 1367.56,78 h60
  text "5V" at -167,35 h60 r270
  text "GND" at -165,-52 h60 r270
Bottom Overlay:
  text "LOGi EDU" at 245,653 h80
  text "RA.3" at 249,581 h80
Generic Top Title Block:
  lines w0: 6414.83,-2489.5 4021.83,-2489.5 4021.83,-1899.69 6414.83,-1899.69
  lines w8: 4719.78,-2489.5 4719.78,-1899.69 ; 4719.78,-2292.9 6414.83,-2292.9 ; 4719.78,-2096.29 6414.83,-2096.29 ; 5268.18,-2292.9 5268.18,-2096.29 ; 6414.83,-2489.5 4021.83,-2489.5 4021.83,-1899.69 6414.83,-1899.69
  lines w10: -3485,-1590 -3385,-1590 ; -3485,-590 -3385,-590 -3385,410 -3485,410 ; -3485,1410 -3385,1410 ; -3485,2410 -3385,2410 ; -3485,3410 -3385,3410 ; -3485,4410 -3385,4410 ; -2485,-2590 -2485,-2490 ; -2485,4810 -2485,4910 ; -1485,-2590 -1485,-2490 ; -1485,4810 -1485,4910 ; -485,-2590 -485,-2490 ; -485,4810 -485,4910 ; 515,-2590 515,-2490 ; 515,4810 515,4910 ; 1515,-2590 1515,-2490 ; 1515,4810 1515,4910 ; 2515,-2590 2515,-2490 ; 2515,4810 2515,4910 ; 3515,-2590 3515,-2490 ; 3515,4810 3515,4910 ; 4515,-2590 4515,-2490 ; 4515,4810 4515,4910 ; 5515,-2590 5515,-2490 ; 5515,4810 5515,4910 ; 6414.83,-2489.5 6414.83,-1899.69 ; 6415,-1590 6515,-1590 ; 6415,-590 6515,-590 6515,410 6415,410 ; 6415,1410 6515,1410 ; 6415,2410 6515,2410 ; 6415,3410 6515,3410 ; 6415,4410 6515,4410 ; 6515,-2490 6515,-2590 ; 6515,-2590 6515,4910 -3485,4910 -3485,-2590 6515,-2590 ; -3385,-2490 -3385,4810 6415,4810 6415,-2490 -3385,-2490
  text "1" at -3020,4830 h60
  text "2" at -1945,4830 h60
  text "3" at -995,4830 h60
  text "4" at 55,4830 h60
  text "5" at 1005,4830 h60
  text "6" at 2030,4830 h60
  text "7" at 2980,4830 h60
  text "8" at 3955,4830 h60
  text "9" at 5055,4830 h60
  text "10" at 6005,4830 h60
  text "H" at -3470,4575 h60
  text "H" at 6435,4570 h60
  text "G" at -3470,3850 h60
  text "G" at 6435,3845 h60
  text "F" at -3460,2865 h60
  text "F" at 6445,2860 h60
  text "E" at -3470,1900 h60
  text "E" at 6435,1895 h60
  text "D" at -3470,900 h60
  text "D" at 6435,895 h60
  text "C" at -3460,-70 h60
  text "C" at 6445,-75 h60
  text "B" at -3465,-1115 h60
  text "B" at 6440,-1120 h60
  text ".PCB_TITLE" at 4769,-2037 h60
  text "" at 4520.37,-2051.77 h60
  text "" at 4602.48,-2051.77 h60
  text "A" at -3460,-2115 h60
  text "A" at 6445,-2120 h60
  text "R" at 4769.64,-2245.4 h60
  text "e" at 4824.38,-2245.4 h60
  text "v" at 4879.13,-2245.4 h60
  text ":" at 4933.87,-2245.4 h60
  text "2" at 4071.68,-2252.46 h60
  text ".PCB_VERSION" at 4997,-2253 h60
  text ".ENGINEER" at 5325,-2254 h60
  text "" at 4271.1,-2264.56 h60
  text "" at 4421.65,-2264.56 h60
  text "W" at 4071.68,-2343.7 h60
  text "a" at 4153.8,-2343.7 h60
  text "v" at 4208.54,-2343.7 h60
  text "e" at 4263.29,-2343.7 h60
  text "n" at 4318.03,-2343.7 h60
  text "u" at 4372.78,-2343.7 h60
  text "m" at 4427.52,-2343.7 h60
  text "b" at 4509.64,-2343.7 h60
  text "e" at 4564.38,-2343.7 h60
  text "r" at 4619.13,-2343.7 h60
  text ".GERBER_GEN_DATE" at 4754,-2438 h60
  text "T" at 4071.68,-2442 h60
  text "e" at 4126.42,-2442 h60
  text "c" at 4181.17,-2442 h60
  text "h" at 4222.23,-2442 h60
  text "n" at 4276.97,-2442 h60
  text "o" at 4331.72,-2442 h60
  text "l" at 4386.46,-2442 h60
  text "o" at 4413.84,-2442 h60
  text "g" at 4468.58,-2442 h60
  text "i" at 4523.33,-2442 h60
  text "e" at 4550.7,-2442 h60
  text "s" at 4605.44,-2442 h60
  text "1" at -3010,-2565 h60
  text "2" at -1935,-2565 h60
  text "3" at -985,-2565 h60
  text "4" at 65,-2565 h60
  text "5" at 1015,-2565 h60
  text "6" at 2040,-2565 h60
  text "7" at 2990,-2565 h60
  text "8" at 3965,-2565 h60
  text "9" at 5065,-2565 h60
  text "10" at 6015,-2565 h60
PCB Notes Title Block:
  lines w0: 6414.83,-2489.5 4021.83,-2489.5 4021.83,-1899.69 6414.83,-1899.69
  lines w8: 4719.78,-2489.5 4719.78,-1899.69 ; 4719.78,-2292.9 6414.83,-2292.9 ; 4719.78,-2096.29 6414.83,-2096.29 ; 5268.18,-2292.9 5268.18,-2096.29 ; 6414.83,-2489.5 4021.83,-2489.5 4021.83,-1899.69 6414.83,-1899.69
  lines w10: -3485,-1590 -3385,-1590 ; -3485,-590 -3385,-590 -3385,410 -3485,410 ; -3485,1410 -3385,1410 ; -3485,2410 -3385,2410 ; -3485,3410 -3385,3410 ; -3485,4410 -3385,4410 ; -2485,-2590 -2485,-2490 ; -2485,4810 -2485,4910 ; -1485,-2590 -1485,-2490 ; -1485,4810 -1485,4910 ; -485,-2590 -485,-2490 ; -485,4810 -485,4910 ; 515,-2590 515,-2490 ; 515,4810 515,4910 ; 1515,-2590 1515,-2490 ; 1515,4810 1515,4910 ; 2515,-2590 2515,-2490 ; 2515,4810 2515,4910 ; 3515,-2590 3515,-2490 ; 3515,4810 3515,4910 ; 4515,-2590 4515,-2490 ; 4515,4810 4515,4910 ; 5515,-2590 5515,-2490 ; 5515,4810 5515,4910 ; 6414.83,-2489.5 6414.83,-1899.69 ; 6415,-1590 6515,-1590 ; 6415,-590 6515,-590 6515,410 6415,410 ; 6415,1410 6515,1410 ; 6415,2410 6515,2410 ; 6415,3410 6515,3410 ; 6415,4410 6515,4410 ; 6515,-2490 6515,-2590 ; 6515,-2590 6515,4910 -3485,4910 -3485,-2590 6515,-2590 ; -3385,-2490 -3385,4810 6415,4810 6415,-2490 -3385,-2490
  text "1" at -3020,4830 h60
  text "2" at -1945,4830 h60
  text "3" at -995,4830 h60
  text "4" at 55,4830 h60
  text "5" at 1005,4830 h60
  text "6" at 2030,4830 h60
  text "7" at 2980,4830 h60
  text "8" at 3955,4830 h60
  text "9" at 5055,4830 h60
  text "10" at 6005,4830 h60
  text "H" at -3470,4575 h60
  text "H" at 6435,4570 h60
  text "G" at -3470,3850 h60
  text "G" at 6435,3845 h60
  text "F" at -3460,2865 h60
  text "F" at 6445,2860 h60
  text "E" at -3470,1900 h60
  text "E" at 6435,1895 h60
  text "D" at -3470,900 h60
  text "D" at 6435,895 h60
  text "C" at -3460,-70 h60
  text "C" at 6445,-75 h60
  text "B" at -3465,-1115 h60
  text "B" at 6440,-1120 h60
  text ".PCB_TITLE" at 4769,-2037 h60
  text "" at 4520.37,-2051.77 h60
  text "" at 4602.48,-2051.77 h60
  text "A" at -3460,-2115 h60
  text "A" at 6445,-2120 h60
  text "R" at 4769.64,-2245.4 h60
  text "e" at 4824.38,-2245.4 h60
  text "v" at 4879.13,-2245.4 h60
  text ":" at 4933.87,-2245.4 h60
  text "2" at 4071.68,-2252.46 h60
  text ".PCB_VERSION" at 4997,-2253 h60
  text ".ENGINEER" at 5325,-2254 h60
  text "" at 4271.1,-2264.56 h60
  text "" at 4421.65,-2264.56 h60
  text "W" at 4071.68,-2343.7 h60
  text "a" at 4153.8,-2343.7 h60
  text "v" at 4208.54,-2343.7 h60
  text "e" at 4263.29,-2343.7 h60
  text "n" at 4318.03,-2343.7 h60
  text "u" at 4372.78,-2343.7 h60
  text "m" at 4427.52,-2343.7 h60
  text "b" at 4509.64,-2343.7 h60
  text "e" at 4564.38,-2343.7 h60
  text "r" at 4619.13,-2343.7 h60
  text ".GERBER_GEN_DATE" at 4754,-2438 h60
  text "T" at 4071.68,-2442 h60
  text "e" at 4126.42,-2442 h60
  text "c" at 4181.17,-2442 h60
  text "h" at 4222.23,-2442 h60
  text "n" at 4276.97,-2442 h60
  text "o" at 4331.72,-2442 h60
  text "l" at 4386.46,-2442 h60
  text "o" at 4413.84,-2442 h60
  text "g" at 4468.58,-2442 h60
  text "i" at 4523.33,-2442 h60
  text "e" at 4550.7,-2442 h60
  text "s" at 4605.44,-2442 h60
  text "1" at -3010,-2565 h60
  text "2" at -1935,-2565 h60
  text "3" at -985,-2565 h60
  text "4" at 65,-2565 h60
  text "5" at 1015,-2565 h60
  text "6" at 2040,-2565 h60
  text "7" at 2990,-2565 h60
  text "8" at 3965,-2565 h60
  text "9" at 5065,-2565 h60
  text "10" at 6015,-2565 h60
PCB Notes:
  lines w50: -3200,790 1000,790 ; -3150,3990 5800,3990 ; 1050,-360 1050,640
  text "PCB Fabrication Notes" at -3146,4135 h60
  text "Unless otherwise specified, all dimensions are in inches" at -3150,3740 h60
  text "Overall Dimension:   Z.Z\" x  Y.Y\"" at -3150,3540 h60
  text "Finished Thickness:  .062\"" at -3150,3340 h60
  text "Layer Count:" at -3150,3140 h60
  text "Drill Count:" at -3150,2940 h60
  text ".Hole_Count" at -2050,2940 h60
  text "PAD Count:" at -3150,2740 h60
  text ".PAD_Count" at -2050,2740 h60
  text "Solder Mask:  Green LPI SMOBC" at -3150,2540 h60
  text "Silkscreen:  White Non-Conductive Ink LPI Process" at -3150,2340 h60
  text "RS274-X Gerber Format, 2.5 Leading Zeros Suppressed" at -3150,2140 h60
  text "Excellon Drill Format, 2.5 Trailing Zeros Suppressed" at -3150,1940 h60
  text "Layer Details" at -3200,940 h60
  text "POLARITY" at -300,890 h60
  text ".GTL" at -3150,440 h60
  text "Top Copper" at -2200,440 h60
  text "POSITIVE" at -200,440 h60
  text ".GBL" at -3150,240 h60
  text "Bottom Copper" at -2200,240 h60
  text "POSITIVE" at -200,240 h60
  text "N-Layer Stackup" at 1200,140 h60
  text ".GTO" at -3150,-1110 h60
  text "Top Silkscreen" at -2150,-1110 h60
  text ".GBO" at -3150,-1310 h60
  text "Bottom Silkscreen" at -2150,-1310 h60
  text ".GTS" at -3150,-1660 h60
  text "Top Soldermask" at -2150,-1660 h60
  text ".GBS" at -3150,-1860 h60
  text "Bottom Soldermask" at -2150,-1860 h60
  text ".TXT" at -3150,-2060 h60
  text "NC-DRILL" at -2150,-2060 h60
Fabrication Reference  Title Block:
  lines w0: 6414.83,-2489.5 4021.83,-2489.5 4021.83,-1899.69 6414.83,-1899.69
  lines w8: 4719.78,-2489.5 4719.78,-1899.69 ; 4719.78,-2292.9 6414.83,-2292.9 ; 4719.78,-2096.29 6414.83,-2096.29 ; 5268.18,-2292.9 5268.18,-2096.29 ; 6414.83,-2489.5 4021.83,-2489.5 4021.83,-1899.69 6414.83,-1899.69
  lines w10: -3485,-1590 -3385,-1590 ; -3485,-590 -3385,-590 -3385,410 -3485,410 ; -3485,1410 -3385,1410 ; -3485,2410 -3385,2410 ; -3485,3410 -3385,3410 ; -3485,4410 -3385,4410 ; -2485,-2590 -2485,-2490 ; -2485,4810 -2485,4910 ; -1485,-2590 -1485,-2490 ; -1485,4810 -1485,4910 ; -485,-2590 -485,-2490 ; -485,4810 -485,4910 ; 515,-2590 515,-2490 ; 515,4810 515,4910 ; 1515,-2590 1515,-2490 ; 1515,4810 1515,4910 ; 2515,-2590 2515,-2490 ; 2515,4810 2515,4910 ; 3515,-2590 3515,-2490 ; 3515,4810 3515,4910 ; 4515,-2590 4515,-2490 ; 4515,4810 4515,4910 ; 5515,-2590 5515,-2490 ; 5515,4810 5515,4910 ; 6414.83,-2489.5 6414.83,-1899.69 ; 6415,-1590 6515,-1590 ; 6415,-590 6515,-590 6515,410 6415,410 ; 6415,1410 6515,1410 ; 6415,2410 6515,2410 ; 6415,3410 6515,3410 ; 6415,4410 6515,4410 ; 6515,-2490 6515,-2590 ; 6515,-2590 6515,4910 -3485,4910 -3485,-2590 6515,-2590 ; -3385,-2490 -3385,4810 6415,4810 6415,-2490 -3385,-2490
  text "1" at -3020,4830 h60
  text "2" at -1945,4830 h60
  text "3" at -995,4830 h60
  text "4" at 55,4830 h60
  text "5" at 1005,4830 h60
  text "6" at 2030,4830 h60
  text "7" at 2980,4830 h60
  text "8" at 3955,4830 h60
  text "9" at 5055,4830 h60
  text "10" at 6005,4830 h60
  text "H" at -3470,4575 h60
  text "H" at 6435,4570 h60
  text "Fabrication Reference Drawing" at -1800,4390 h60
  text "G" at -3470,3850 h60
  text "G" at 6435,3845 h60
  text "F" at -3460,2865 h60
  text "F" at 6445,2860 h60
  text "E" at -3470,1900 h60
  text "E" at 6435,1895 h60
  text "D" at -3470,900 h60
  text "D" at 6435,895 h60
  text "C" at -3460,-70 h60
  text "C" at 6445,-75 h60
  text "B" at -3465,-1115 h60
  text "B" at 6440,-1120 h60
  text ".PCB_TITLE" at 4769,-2037 h60
  text "" at 4520.37,-2051.77 h60
  text "" at 4602.48,-2051.77 h60
  text "A" at -3460,-2115 h60
  text "A" at 6445,-2120 h60
  text "R" at 4769.64,-2245.4 h60
  text "e" at 4824.38,-2245.4 h60
  text "v" at 4879.13,-2245.4 h60
  text ":" at 4933.87,-2245.4 h60
  text "2" at 4071.68,-2252.46 h60
  text ".PCB_VERSION" at 4997,-2253 h60
  text ".ENGINEER" at 5325,-2254 h60
  text "" at 4271.1,-2264.56 h60
  text "" at 4421.65,-2264.56 h60
  text "W" at 4071.68,-2343.7 h60
  text "a" at 4153.8,-2343.7 h60
  text "v" at 4208.54,-2343.7 h60
  text "e" at 4263.29,-2343.7 h60
  text "n" at 4318.03,-2343.7 h60
  text "u" at 4372.78,-2343.7 h60
  text "m" at 4427.52,-2343.7 h60
  text "b" at 4509.64,-2343.7 h60
  text "e" at 4564.38,-2343.7 h60
  text "r" at 4619.13,-2343.7 h60
  text ".GERBER_GEN_DATE" at 4754,-2438 h60
  text "T" at 4071.68,-2442 h60
  text "e" at 4126.42,-2442 h60
  text "c" at 4181.17,-2442 h60
  text "h" at 4222.23,-2442 h60
  text "n" at 4276.97,-2442 h60
  text "o" at 4331.72,-2442 h60
  text "l" at 4386.46,-2442 h60
  text "o" at 4413.84,-2442 h60
  text "g" at 4468.58,-2442 h60
  text "i" at 4523.33,-2442 h60
  text "e" at 4550.7,-2442 h60
  text "s" at 4605.44,-2442 h60
  text "1" at -3010,-2565 h60
  text "2" at -1935,-2565 h60
  text "3" at -985,-2565 h60
  text "4" at 65,-2565 h60
  text "5" at 1015,-2565 h60
  text "6" at 2040,-2565 h60
  text "7" at 2990,-2565 h60
  text "8" at 3965,-2565 h60
  text "9" at 5065,-2565 h60
  text "10" at 6015,-2565 h60
Board Outline:
  the board outline again, w30